# Altium PCB PCB.PcbDoc
Units mil, origin at the board's own origin, x right, y up, seen from the top; angles counter-clockwise.
Board outline 3543.66 x 3064.08 mil, 2 copper layers (Top Layer, Bottom Layer), stack 12.8 mil thick; 54 components, 65 nets, 265 pads, 11 vias.
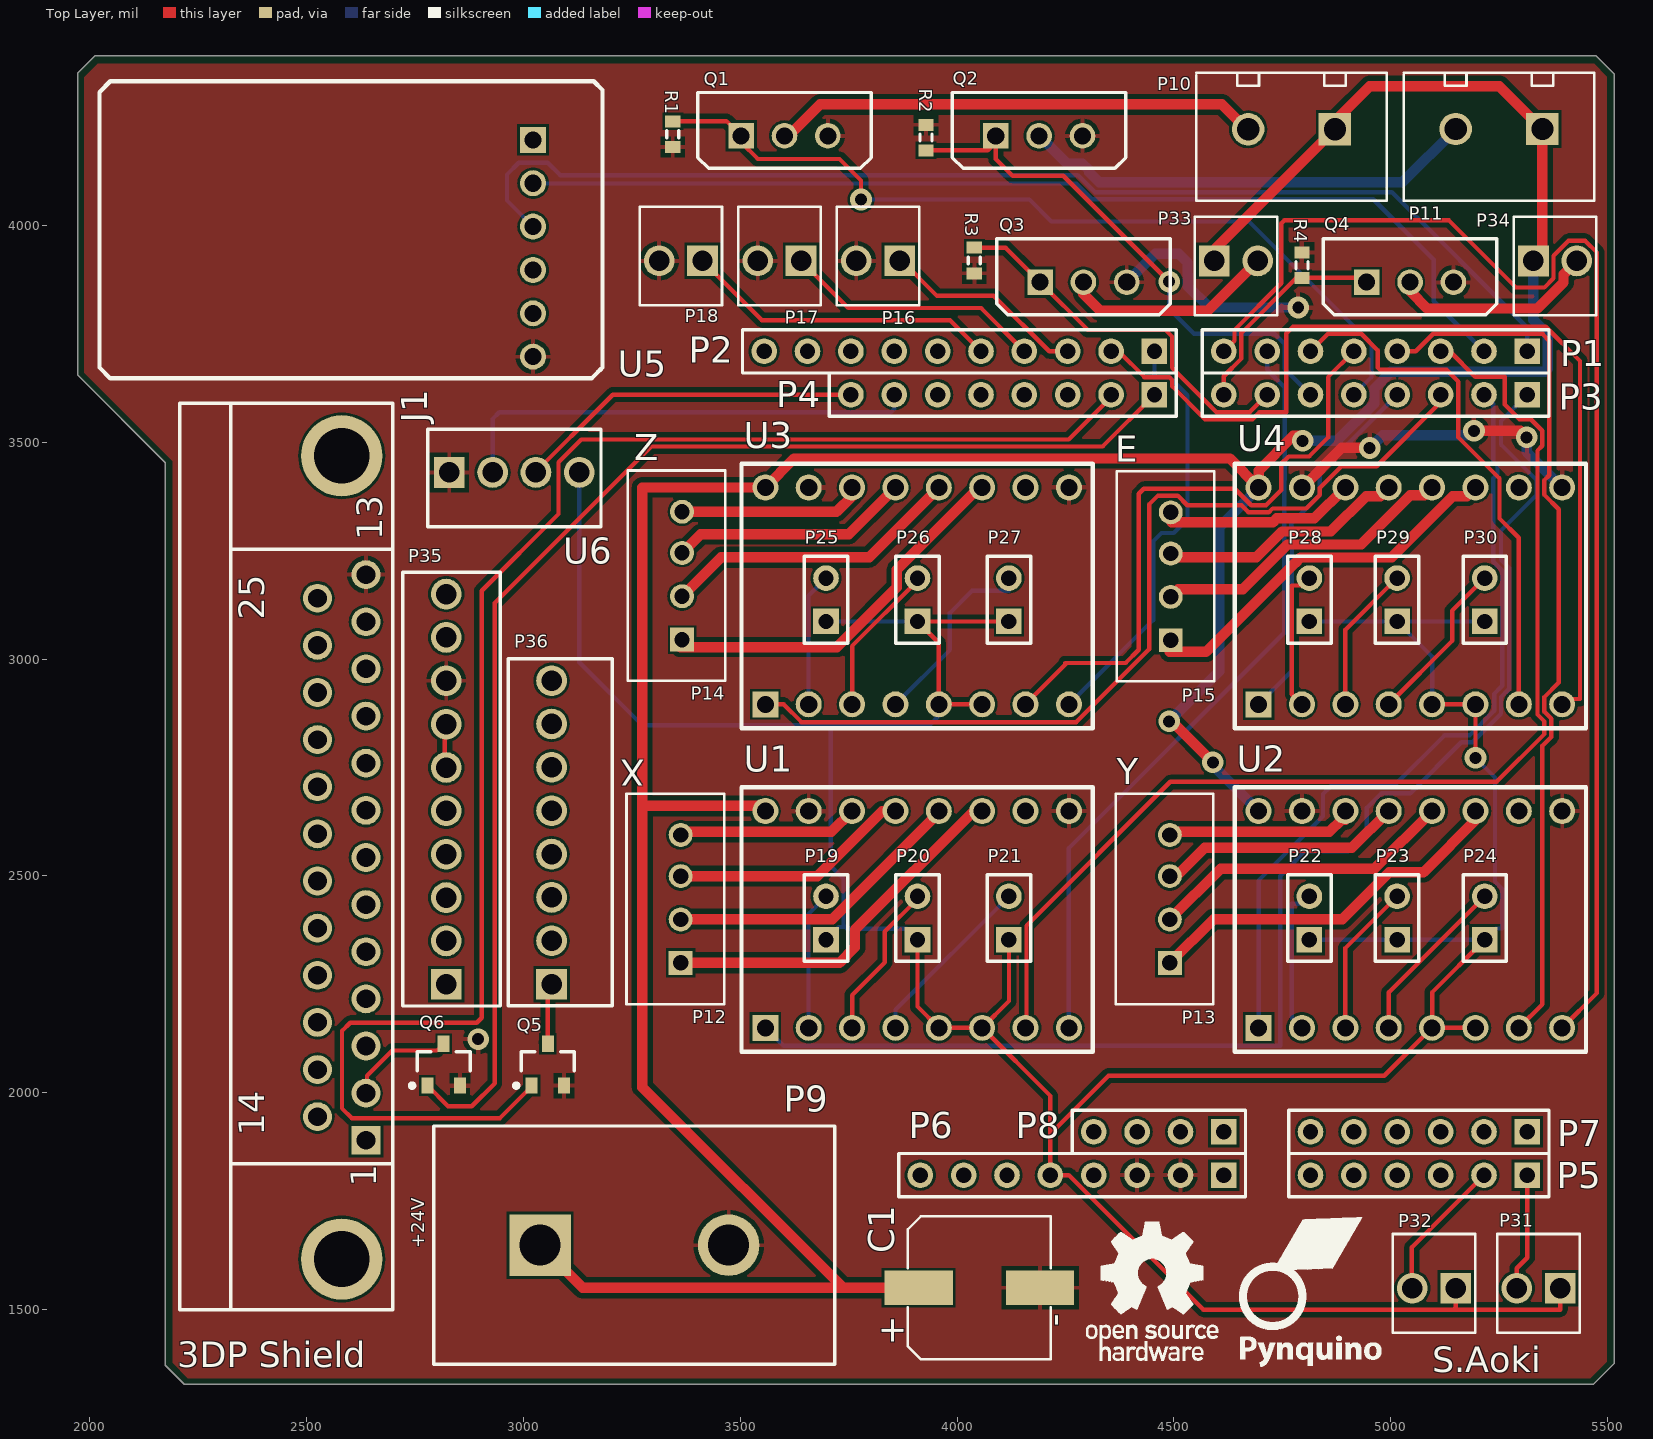
[diagram p0: Top Layer view]
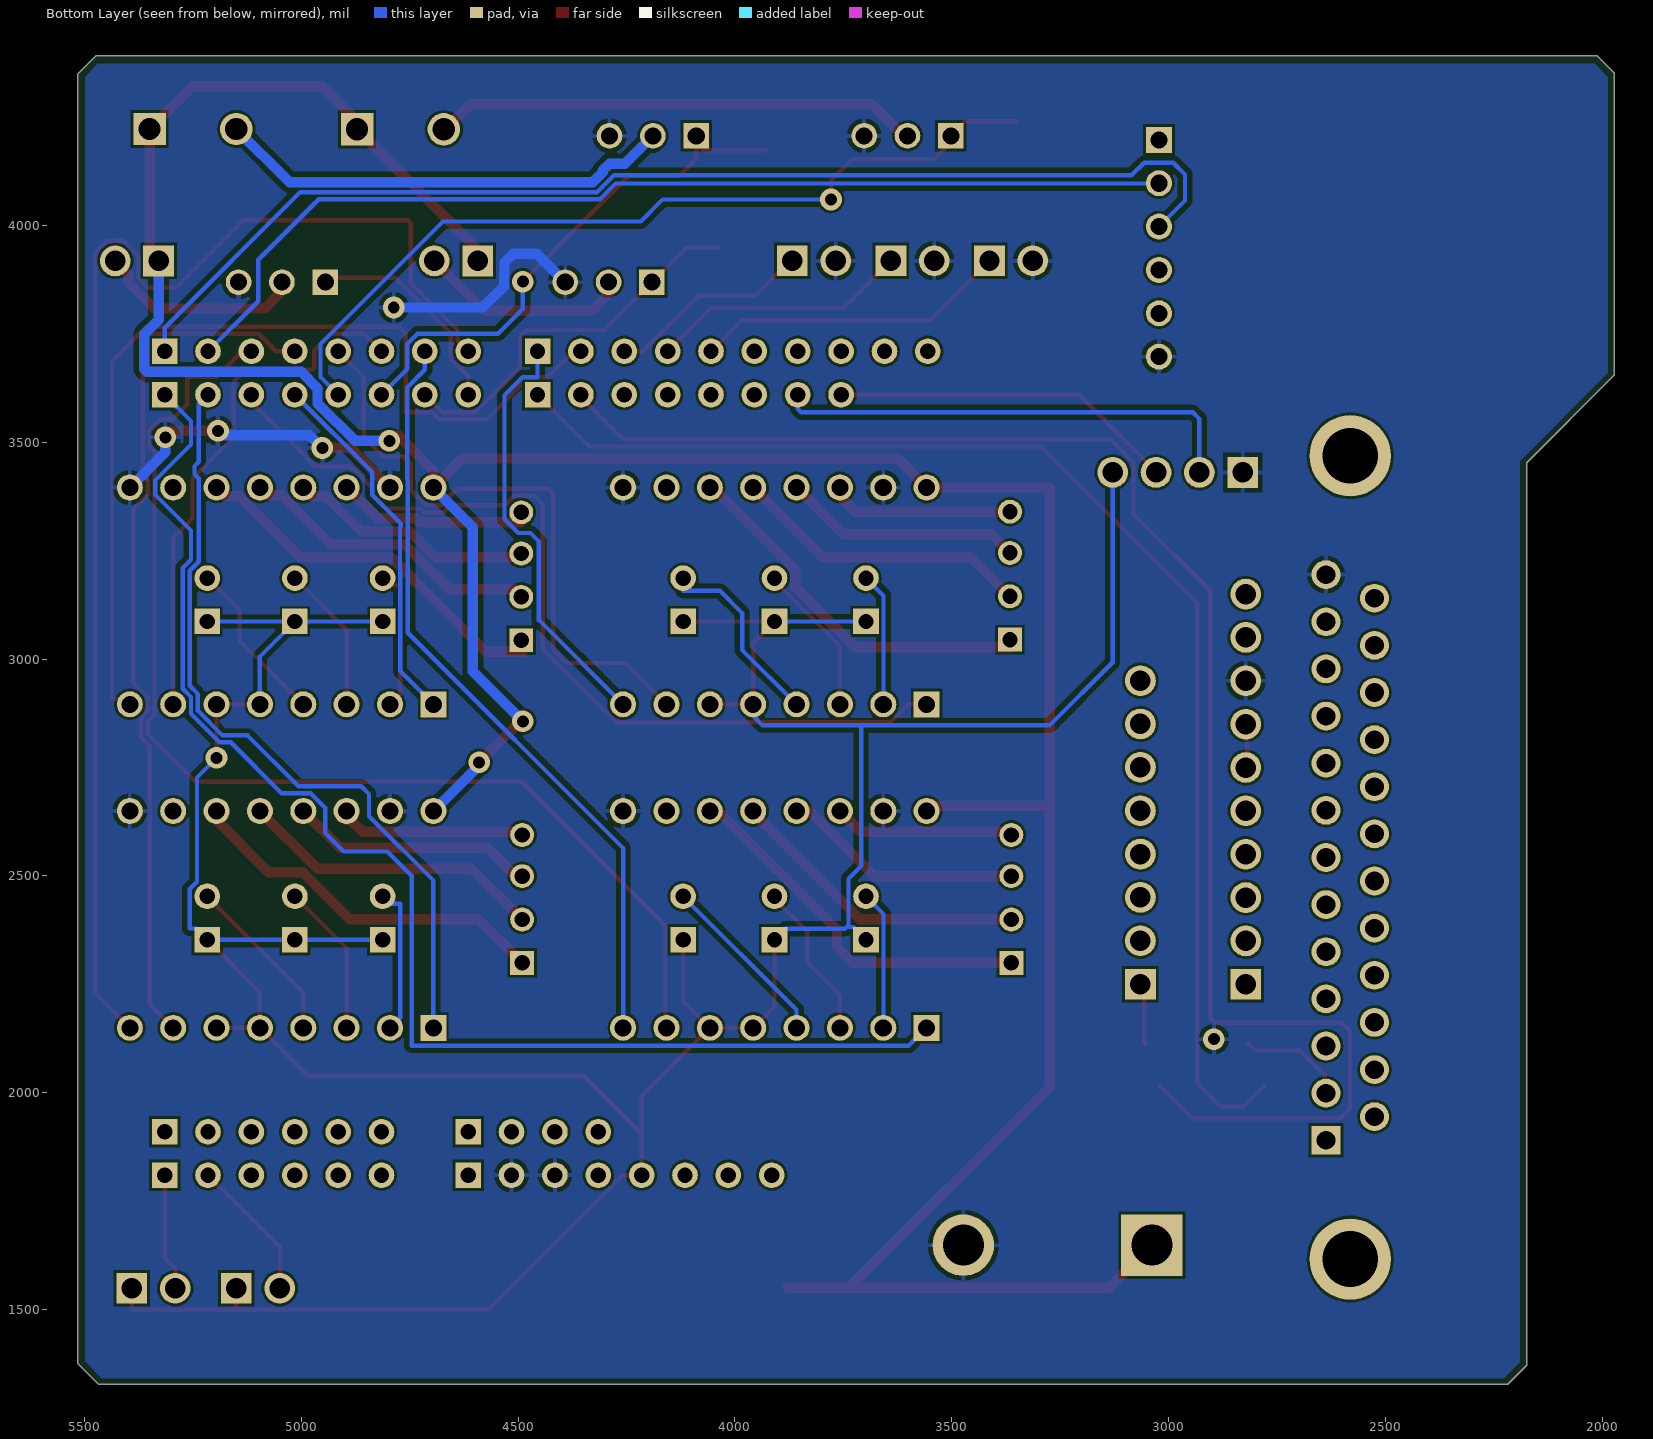
[diagram p1: Bottom Layer view, seen from below]

## Layer stack, top to bottom
Top Solder: solder mask 0.4, Solder Resist, Dk 3.5
Top Layer: signal copper 1.4
Dielectric 1: core 10, FR-4, Dk 4.2
Bottom Layer: signal copper 1.4
Bottom Solder: solder mask 0.4, Solder Resist, Dk 3.5

## Board outline
2173.73,1371.47 2173.73,1633.22 2173.73,3453.14 1971.85,3655.02 1971.85,4351.63 2011.89,4391.68 5473.34,4391.68 5515,4350.01 5515,1750 5515.51,1750.76 5515.51,1375.75 5467.35,1327.59 2217.61,1327.59

## Design rules (kind name [scope] priority, off if disabled: settings)
Clearance Clearance_M1 [OnLayer('Mechanical 1')] p1: gap=11.81 ignorepadtopadclearanceinfootprint=FALSE
Clearance [All] p2: gap=6 ignorepadtopadclearanceinfootprint=FALSE except(11.81: Track-Poly)
ComponentClearance [All] p1: gap=0 collisioncheckmode=3 verticalgap=0 showdistances=FALSE
HoleSize [All] p1: absolutevalues=TRUE maxlimit=130 minlimit=1 maxpercent=80.000 minpercent=20.000
MinimumSolderMaskSliver [All] p1: minsoldermaskwidth=0
PlaneConnect [All] p1: pad.planeconnectstyle=Relief pad.reliefexpansion=20 pad.reliefentries=4 pad.reliefconductorwidth=10 pad.reliefairgap=10 via.planeconnectstyle=Direct via.reliefexpansion=20 via.reliefentries=4 via.reliefconductorwidth=10 via.reliefairgap=10
PolygonConnect [All] p1: connectstyle=Relief reliefconductorwidth=10 reliefentries=4 polygonreliefangle="90 Angle" airgapwidth=10
RoutingVias [All] p1: holewidth=28 width=50 viastyle="Through Hole" minholewidth=28 minwidth=50 maxholewidth=28 maxwidth=50
SilkToSilkClearance [All] p1: silktosilkclearance=0
SilkToSolderMaskClearance [IsPad] p1: minsilkscreentomaskgap=1 clearancetoexposedcopper=TRUE
SolderMaskExpansion [All] p1: expansion=4
Width Width_Stepper_NetClass [InNetClass('Stepper')] p1: maxlimit=24 minlimit=10 preferedwidth=24
Width Width_Power_NetClass [InNetClass('Power')] p2: maxlimit=24 minlimit=10 preferedwidth=24 minimp=50.000000 maximp=50.000000 favimp=50.000000
Width [All] p3: maxlimit=10 minlimit=10 preferedwidth=10
24 further rules are at their usual default settings.

## Classes and differential pairs
component class Misc: C1 J1 P1 P2 P3 P4 P5 P6 P7 P8 P9 P35 P36 Q5 Q6 U5 U6
net class Stepper: E8-1 E8-2 E8-3 E8-4 X8-1 X8-2 X8-3 X8-4 Y8-1 Y8-2 Y8-3 Y8-4 Z8-1 Z8-2 Z8-3 Z8-4
net class Power: +24V GND NetP10_2 NetP11_2 NetP33_2 NetP34_2
component class Connector: P10 P11 P12 P13 P14 P15 P16 P17 P18 P19 P20 P21 P22 P23 P24 P25 P26 P27 P28 P29 P30 P31 P32 P33 P34 Q1 Q2 Q3 Q4 R1 R2 R3 R4 R? U1 U2 U3 U4 X

## Components (designator, comment, footprint, x,y, rotation, side; value= is the part's Value field where it differs from the comment)
C1 "Cap_alumi_electrolytic" EEE-1HA101UP 4191.23,1550.27 r270 top
J1 "D Connector 25" DSUB1.385-2H25A 2206.71,2542.69 r90 top
P1 "" HDR1X8 5315,3710 r180 top
P2 "" HDR1X10 4455,3710 r180 top
P3 "" HDR1X8 5315,3610 r180 top
P4 "" HDR1X8 4455,3610 r180 top
P5 "" HDR1X6 5315,1810 r180 top
P6 "" HDR1X8 4615,1810 r180 top
P7 "" HDR1X6 5315,1910 r180 top
P8 "Header 4" HDR1X4 4615,1910 r180 top
P9 "BP101L-2PN10" BP101L-2PN10 3038.15,1648.44 r0 top
P10 "OSTTC02-0162" OSTTC02-0162 4871.18,4222.01 r180 top
P11 "OSTTC02-0162" OSTTC02-0162 5349.76,4222.63 r180 top
P12 "B4B-XH-A(LF)(SN)" B4B-XH-A 3362.45,2299.62 r90 top
P13 "B4B-XH-A(LF)(SN)" B4B-XH-A 4490.51,2299.62 r90 top
P14 "B4B-XH-A(LF)(SN)" B4B-XH-A 3365.61,3045.04 r90 top
P15 "B4B-XH-A(LF)(SN)" B4B-XH-A 4492.59,3043.65 r90 top locked
P16 "2204-1021" MOLEX_2204_1021 3867.41,3918.64 r180 top
P17 "2204-1021" MOLEX_2204_1021 3640.08,3918.64 r180 top
P18 "2204-1021" MOLEX_2204_1021 3412.74,3918.64 r180 top
P19 "Header 2" HDR1X2 3697.57,2352.97 r90 top
P20 "Header 2" HDR1X2 3908.49,2352.97 r90 top
P21 "Header 2" HDR1X2 4119.41,2352.97 r90 top
P22 "Header 2" HDR1X2 4812.41,2352.97 r90 top
P23 "Header 2" HDR1X2 5014.59,2352.97 r90 top
P24 "Header 2" HDR1X2 5216.77,2352.97 r90 top
P25 "Header 2" HDR1X2 3697.57,3086.99 r90 top
P26 "Header 2" HDR1X2 3908.49,3086.99 r90 top
P27 "Header 2" HDR1X2 4119.41,3086.99 r90 top
P28 "Header 2" HDR1X2 4812.41,3086.99 r90 top
P29 "Header 2" HDR1X2 5014.59,3086.99 r90 top
P30 "Header 2" HDR1X2 5216.77,3086.99 r90 top
P31 "2204-1021" MOLEX_2204_1021 5390.76,1549.25 r180 top
P32 "2204-1021" MOLEX_2204_1021 5149.76,1549.25 r180 top
P33 "2204-1021" MOLEX_2204_1021 4593.17,3918.45 r0 top
P34 "2204-1021" MOLEX_2204_1021 5329.03,3918.45 r0 top
P35 "22041101" PHOENIX_10PIN_MOLEX 2821.66,2250.13 r90 top
P36 "22041081" PHOENIX_8PIN_MOLEX 3064.63,2250.5 r90 top
Q1 "2SK2232" 2SK2232 3501.78,4206.87 r0 top
Q2 "2SK2232" 2SK2232 4089.01,4206.87 r0 top
Q3 "2SK2232" 2SK2232 4191.23,3869.43 r0 top
Q4 "2SK2232" 2SK2232 4944.53,3869.43 r0 top
Q5 "MMBF170" MMBF170-SOT95P240X130-3N 3056.03,2064.74 r90 top
Q6 "MMBF170" MMBF170-SOT95P240X130-3N 2815.69,2064.74 r90 top
R1 "" J1-0603 3344.31,4210.69 r270 top value=10K
R2 "" J1-0603 3928.16,4202.81 r90 top value=10K
R3 "" J1-0603 4039.69,3919.37 r270 top value=10K
R4 "" J1-0603 4795.33,3908.64 r90 top value=10K
U1 "DRV8825" DRV8825 4257.72,2149.78 r90 top locked
U2 "DRV8825" DRV8825 5395.33,2149.78 r90 top locked
U3 "DRV8825" DRV8825 4257.72,2895.88 r90 top locked
U4 "DRV8825" DRV8825 5395.33,2895.88 r90 top locked
U5 "FTDI_USB_Serial" FTDI_USB_Serial 3021.95,4197.59 r0 top
U6 "RS232C_TO_TTL_MOLEX" RS232C_TO_TTL_MOLEX 2828.67,3430.59 r0 top

## Footprints (in the part's own frame and the unit in brackets; to place one, negate y for a bottom-side part, rotate by r counter-clockwise, add the part's x,y. Pads: shape width x height; smd on the part's side, far side on the other; paste and mask are expansions set on the pad)
2SK2232 [mm]
  round 1.5 hole 1: D(2.54,0) S(5.08,0)
  rect 1.5x1.5 hole 1: G(0,0)
  silkscreen extent -2.54,-1.91 7.62,2.54
B4B-XH-A [mm]
  rect 1.4x1.4 hole 0.9: 1(0,0)
  round 1.4 hole 0.9: 2(2.54,0) 3(5.08,0) 4(7.493,0)
  silkscreen extent -2.41,-2.54 9.91,3.18
BP101L-2PN10 [mm]
  rect 3.6x3.6 hole 2.4: 1(0,0)
  round 3.6 hole 2.4: 2(11.049,0)
  silkscreen extent -6.22,-6.98 17.27,6.98
DRV8825 [mil]
  round 60 hole 39.37: A1(500,300) A2(500,200) B1(500,400) B2(500,500) DIR(0,0) FAULT(500,100) GND(500,600) GND(500,0) M0(0,600) M1(0,500) M2(0,400) RESET(0,300) SLEEP(0,200) STEP(0,100) VMOT(500,700)
  rect 60x60 hole 39.37: ENABLE(0,700)
  silkscreen extent -55,-55 555,755
DSUB1.385-2H25A [mm] "Connector; D Subminiature; 25 Position; Right Angle; Pitch 1.385 mm"
  rect 1.69x1.69 hole 1.09: 1(-16.566,-10.92)
  round 1.69 hole 1.09: 2(-13.805,-10.92) 3(-11.044,-10.92) 4(-8.283,-10.92) 5(-5.522,-10.92) 6(-2.761,-10.92) 7(0,-10.92) 8(2.761,-10.92) 9(5.522,-10.92) 10(8.283,-10.92) 11(11.044,-10.92) 12(13.805,-10.92) 13(16.566,-10.92) 14(-15.185,-8.08) 15(-12.424,-8.08) 16(-9.663,-8.08) 17(-6.902,-8.08) 18(-4.141,-8.08) 19(-1.38,-8.08) 20(1.381,-8.08) 21(4.142,-8.08) 22(6.903,-8.08) 23(9.664,-8.08) 24(12.425,-8.08) 25(15.186,-8.08)
  round 4.76 hole 3.26: 26(-23.526,-9.5) 27(23.526,-9.5)
  silkscreen extent -26.5,-12.5 26.6,0
EEE-1HA101UP [mm]
  rect 2x4 smd: 1(0,0) 2(0,-7.112)
  silkscreen extent -4.19,-7.75 4.19,0.64
FTDI_USB_Serial [mil]
  rect 60x60 hole 39.37: 1(0,0)
  round 60 hole 39.37: 2(0,-100) 3(0,-200) 4(0,-300) 5(0,-400) 6(0,-500)
  silkscreen extent -1000,-550 160,135
HDR1X2 [mm] "Connector; Header; 2 Position"
  rect 1.5x1.5 hole 0.9: 1(0,0)
  round 1.5 hole 0.9: 2(2.54,0)
  silkscreen extent -1.27,-1.27 3.81,1.27
HDR1X4 [mm] "Connector; Header; 4 Position"
  rect 1.5x1.5 hole 0.9: 1(0,0)
  round 1.5 hole 0.9: 2(2.54,0) 3(5.08,0) 4(7.62,0)
  silkscreen extent -1.27,-1.27 8.89,1.27
HDR1X6 [mm] "Connector; Header; 6 Position"
  rect 1.5x1.5 hole 0.9: 1(0,0)
  round 1.5 hole 0.9: 2(2.54,0) 3(5.08,0) 4(7.62,0) 5(10.16,0) 6(12.7,0)
  silkscreen extent -1.27,-1.27 13.97,1.27
HDR1X8 [mm] "Connector; Header; 8 Position"
  rect 1.5x1.5 hole 0.9: 1(0,0)
  round 1.5 hole 0.9: 2(2.54,0) 3(5.08,0) 4(7.62,0) 5(10.16,0) 6(12.7,0) 7(15.24,0) 8(17.78,0)
  silkscreen extent -1.27,-1.27 19.05,1.27
HDR1X10 [mm] "Connector; Header; 10 Position"
  rect 1.5x1.5 hole 0.9: 1(0,0)
  round 1.5 hole 0.9: 2(2.54,0) 3(5.08,0) 4(7.62,0) 5(10.16,0) 6(12.7,0) 7(15.24,0) 8(17.78,0) 9(20.32,0) 10(22.86,0)
  silkscreen extent -1.27,-1.27 24.13,1.27
J1-0603 [mm] "Chip Resistor, Body 1.6x0.8mm, IPC High Density"
  rect 0.7x0.9 smd: 1(-0.75,0) 2(0.75,0)
  silkscreen extent -0.2,-0.35 0.2,0.35, body extent -0.85,-0.48 0.85,0.48, height 0.9
MMBF170-SOT95P240X130-3N [mm] "SOT23, 3-Leads, Body 2.92x2.40mm, Pitch 0.95mm, IPC Medium Density"
  rect 0.95x0.7 smd: 1(-1.225,0.95) 2(-1.225,-0.95) 3(1.225,0)
  silkscreen extent -1.35,-1.55 0.75,1.97, body extent -0.75,-1.56 0.75,1.56, height 1.3
MOLEX_2204_1021 [mm]
  rect 1.8x1.8 hole 1.2: 1(0,0)
  round 1.8 hole 1.2: 2(2.54,0)
  silkscreen extent -1.14,-3.17 3.68,2.6
OSTTC02-0162 [mm]
  rect 1.9x1.9 hole 1.3: 1(0,0)
  round 1.9 hole 1.3: 2(5.08,0)
  silkscreen extent -3.05,-3.3 8.13,4.19
PHOENIX_8PIN_MOLEX [mm]
  rect 1.8x1.8 hole 1.2: 1(0,0)
  round 1.8 hole 1.2: 2(2.54,0) 3(5.08,0) 4(7.62,0) 5(10.16,0) 6(12.7,0) 7(15.24,0) 8(17.78,0)
  silkscreen extent -1.27,-3.56 19.05,2.54
PHOENIX_10PIN_MOLEX [mm]
  rect 1.8x1.8 hole 1.2: 1(0,0)
  round 1.8 hole 1.2: 2(2.54,0) 3(5.08,0) 4(7.62,0) 5(10.16,0) 6(12.7,0) 7(15.24,0) 8(17.78,0) 9(20.32,0) 10(22.86,0)
  silkscreen extent -1.27,-3.17 24.13,2.54
RS232C_TO_TTL_MOLEX [mm]
  rect 1.8x1.8 hole 1.2: GND(0,0)
  round 1.8 hole 1.2: RX(5.08,0) TX(2.54,0) VCC(7.62,0)
  silkscreen extent -1.27,-3.17 8.89,2.54

## Part data
J1: "Receptacle Assembly, 25 Position, Right Angle", PackageDocument=U, DatasheetDocument=19-Mar-1999, Gender=Receptacle, LatestRevisionDate=17-Jul-2002, LatestRevisionNote="Re-released for DXP Platform.", Orientation="Right Angle", PackageReference=787202, Positions=25, Published=15-Jun-2001, Publisher="Altium Limited"
P1 P3 P4 P6: library part "Header 8", "Header, 8-Pin", LatestRevisionDate=17-Jul-2002, LatestRevisionNote="Re-released for DXP Platform.", Publisher="Altium Limited"
P2: library part "Header 10", "Header, 10-Pin", LatestRevisionDate=17-Jul-2002, LatestRevisionNote="Re-released for DXP Platform.", Publisher="Altium Limited"
P5 P7: library part "Header 6", "Header, 6-Pin", LatestRevisionDate=17-Jul-2002, LatestRevisionNote="Re-released for DXP Platform.", Publisher="Altium Limited"
P8: "Header, 4-Pin", LatestRevisionDate=17-Jul-2002, LatestRevisionNote="Re-released for DXP Platform.", Publisher="Altium Limited"
P10 P11: library part TERMINAL_BLOCK_1X2
P12 P13 P14 P15: library part XH_CONNECTOR_1X4
P16 P17 P18 P31 P32 P33 P34: library part MOLEX_1X2_HEADER
P19 P20 P21 P22 P23 P24 P25 P26 P27 P28 P29 P30: "Header, 2-Pin", LatestRevisionDate=17-Jul-2002, LatestRevisionNote="Re-released for DXP Platform.", Publisher="Altium Limited"
P35: library part Phoenix_10pin_MOLEX
P36: library part Phoenix_8pin_MOLEX
R1 R2 R3 R4: library part Res3, "Resistor", LatestRevisionDate=29-May-2009, LatestRevisionNote="IPC-7351 Footprint Added.", PackageDescription="Chip Resistor", PackageReference=J1-0603, Published=8-Jun-2000, Publisher="Altium Limited"
C1: =100uF

## Via types
v1: diameter 50, hole 27.56, Top Layer to Bottom Layer, tented both sides, 11 vias

## Nets (pads, with @x,y where several pads share a name; then routed paths per layer and width w, separated by ;. In a path a pad name is that pad's centre, name@x,y a point inside that pad or via, vN(x,y) a via of type N, cw(c..) or ccw(c..) an arc to the next point about the centre after c; other vN are vias at no path point)
+3V3: P6.5 P19.1 P20.1 P21.1 P22.1 P23.1 P24.1 P25.1 P26.1 P27.1 P28.1 P29.1 P30.1 P31.1 P32.1 U1.RESET U1.SLEEP U2.RESET U2.SLEEP U3.RESET U3.SLEEP U4.RESET U4.SLEEP U6.VCC | length 8232.4
  Top Layer w10: P20.1 3908.49,2199.01 U1.RESET U1.SLEEP ; U3.SLEEP U3.RESET 3957.72,3037.76 P26.1 P27.1 ; P21.1 4119.41,2211.47 U1.SLEEP ; U4.RESET U4.SLEEP v1(5195.33,2772.28) ; P32.1@5149.76,1550.27 P32.1 5149.76,1504 5145.52,1499.76 ; U2.SLEEP U2.RESET ; P24.1 5095.33,2231.53 U2.RESET ; P31.1@5390.76,1538.51 5390.76,1499.76 5145.52,1499.76 ; U1.SLEEP 4215,1992.5 4215,1905.53 ; 4215,1905.53 4348.96,2039.48 4985.03,2039.48 U2.RESET ; 4215,1905.53 P6.5 4257.69,1810 4567.93,1499.76 5145.52,1499.76
  Bottom Layer w10: U6.VCC@3128.67,3437.83 U6.VCC 3128.67,2992.98 3274.35,2847.3 3708.7,2847.3 ; P19.1 3727.05,2382.45 3742.31,2382.45 ; P25.1 P26.1 ; P20.1 3883.22,2378.24 3746.52,2378.24 3742.31,2382.45 ; U3.RESET 3957.72,2868.67 3936.34,2847.3 3708.7,2847.3 ; P22.1 P23.1 P24.1 5242.7,2378.9 5257.29,2378.9 5257.29,2469.76 5240.34,2486.71 5240.34,2727.26 v1(5195.33,2772.28) ; P28.1 P29.1 ; U4.RESET 5095.33,3006.25 P29.1 ; P30.1 P29.1 ; 3708.7,2847.3 3708.7,2522.9 3738.1,2493.5 3738.1,2386.66 3742.31,2382.45
+24V: C1.2 P9.1 P10.1 P11.1 P33.1 P34.1 U1.VMOT U2.VMOT U3.VMOT U4.VMOT | length 8002.6
  Top Layer w24: P9.1 3136.32,1550.27 3736.93,1550.27 ; U1.VMOT 3545.75,2661.75 3274.01,2661.75 ; C1.2@3877.72,1550.27 3736.93,1550.27 ; v1(4489.08,2856.55) 4495.24,2856.55 v1(4589.66,2762.13) ; P33.1 4593.17,3944 P10.1 4871.18,4240.98 4951.89,4321.7 5250.69,4321.7 P11.1 5349.76,3939.17 P34.1 ; v1(4796.83,3503.5) 4785.55,3514.77 4775.48,3514.77 4695.33,3434.62 U4.VMOT 4628.34,3462.86 3624.7,3462.86 U3.VMOT 3274.01,3395.88 3274.01,2661.75 ; 3274.01,2661.75 3274.01,2013.18 3736.93,1550.27
  Bottom Layer w24: v1(4489.08,2856.55) 4604.15,2971.61 4604.15,3304.7 U4.VMOT ; v1(4589.66,2762.13) 4589.66,2755.45 U2.VMOT ; v1(4796.83,3503.5) 4875.71,3503.5 4962.53,3590.31 4962.53,3624.74 5000.26,3662.47 5355.23,3662.47 5362.53,3669.77 5362.53,3749.45 5329.03,3782.94 P34.1
DISP-ON: P4.1 Q6.1 | length 3025.1
  Top Layer w10: Q6.1 2825.77,1969.03 2880.8,1969.03 2933.4,2021.63 2933.4,3129.55 3294.34,3490.49 4335.49,3490.49 P4.1
E8-1: P15.1 U4.A2 | length 861.9
  Top Layer w24: P15.1@4490.51,3016.68 4573.93,3016.68 4778.93,3221.68 4779.89,3221.68 4792.72,3234.51 5001.85,3234.51 5143.33,3375.99 5175.44,3375.99 U4.A2
E8-2: P15.2 U4.A1 | length 710.2
  Top Layer w24: P15.2@4490.51,3141.57 P15.2 4510.34,3161.4 4658.85,3161.4 4761.96,3264.51 4931.85,3264.51 5045.21,3377.88 5077.33,3377.88 U4.A1
E8-3: P15.3 U4.B1 | length 578.1
  Top Layer w24: P15.3@4483.83,3235.13 4690.15,3235.13 4749.53,3294.51 4861.85,3294.51 4943.33,3375.99 4975.44,3375.99 U4.B1
E8-4: P15.4 U4.B2 | length 433.8
  Top Layer w24: P15.4@4494.7,3315.88 4728.46,3315.88 4737.1,3324.51 4823.97,3324.51 U4.B2
E-DIR: P2.2 U4.DIR | length 2207.6
  Top Layer w10: P2.2 4372.35,3710 4431.83,3650.53 4489.08,3650.53 4495.53,3644.08 4495.53,3629.73 4571.78,3553.47 4681.1,3553.47 4697.1,3569.47 4759.3,3569.47 4759.3,3751.26 4774.57,3766.53 5357.42,3766.53 5436.33,3687.62 5436.33,2908.15 5407.6,2908.15 U4.DIR
E-EN: P3.4 U4.ENABLE | length 848
  Bottom Layer w10: U4.ENABLE 4771.88,2972.43 4771.88,3203.77 4772.15,3204.04 4772.15,3305.97 4770.33,3307.79 4770.33,3312.89 4836.33,3378.89 4836.33,3431.33 P3.4
E-M0: P28.2 U4.M0 | length 331.3
  Top Layer w10: U4.M0 4771.88,2919.32 4771.88,3169.9 4795.33,3169.9 P28.2
E-M1: P29.2 U4.M1 | length 340.5
  Top Layer w10: U4.M1 4895.33,3067.73 P29.2
E-M2: P30.2 U4.M2 | length 382.8
  Top Layer w10: U4.M2 5141.53,3042.08 5141.53,3111.75 P30.2
E-STEP: P1.6 U4.STEP | length 1228.8
  Top Layer w10: P1.6 4855.53,3750.53 4931.79,3750.53 4969.65,3712.66 4969.65,3672.69 4975.02,3667.31 5128.7,3667.31 5156.04,3639.97 5156.04,3511.52 5250.69,3416.87 5250.69,3324.51 5295.33,3279.88 U4.STEP
FAN0: P3.7 Q3.G R3.1 | length 891.4
  Top Layer w10: R3.1 4111.76,3948.9 Q3.G 4301.52,3759.14 4480.47,3759.14 4495.53,3744.08 4495.53,3672.16 4598.21,3569.47 4674.47,3569.47 P3.7
FAN1: P3.8 Q4.G R4.1 | length 505.2
  Top Layer w10: P3.8 4615,3652.69 4655.53,3693.21 4655.53,3752.51 4782.62,3879.6 4934.36,3879.6 Q4.G
GND: C1.1 J1.13 P6.2 P6.3 P9.2 P16.2 P17.2 P18.2 P35.8 Q1.S Q2.S Q3.S Q4.S Q5.2 Q6.2 R1.2 R2.2 R3.2 R4.2 U1.GND U2.GND U3.GND U4.GND U5.6 U6.GND | length 1232.8
  Top Layer w24: U4.GND@4795.33,3395.88 4886.62,3487.17 v1(4951.34,3487.17) ; v1(5192.04,3526.43) 5298.7,3526.43 v1(5313.48,3511.65)
  Bottom Layer w24: Q3.S 4456.44,3934.64 4510.75,3934.64 4531.34,3914.05 4531.34,3889.06 4532.08,3888.31 4532.08,3860.28 4581.26,3811.1 v1(4786.71,3811.1) ; v1(4951.34,3487.17) 4981,3516.83 5182.45,3516.83 v1(5192.04,3526.43) ; v1(5313.48,3511.65) 5313.48,3477.72 U4.GND@5395.33,3395.88
  other v1: 2895.32,2123.51
HTR0: P3.5 Q1.G R1.1 | length 1986.4
  Top Layer w10: R1.1@3350,4240.85 3356.07,4240.85 3467.8,4240.85 Q1.G 3501.78,4192.33 3540.47,4153.64 3728.71,4153.64 3778.31,4104.05 v1(3778.31,4060)
  Bottom Layer w10: v1(3778.31,4060) 4166.68,4060 4217.22,4009.46 4672.86,4009.46 4955.53,3726.79 4955.53,3650.53 P3.5
HTR1: P3.6 Q2.G R2.1 | length 1243.2
  Top Layer w10: R2.1 4070.72,4173.29 Q2.G@4089.01,4191.57 ; Q2.G Q2.G@4089.01,4191.57 ; v1(4489.08,3870.5) 4244.79,4114.79 4127.86,4114.79 4089.01,4153.64 Q2.G@4089.01,4191.57
  Bottom Layer w10: v1(4489.08,3870.5) 4489.08,3807.65 4546.21,3750.53 4731.79,3750.53 4755.53,3726.79 4755.53,3669.47 P3.6
NetJ1_2: J1.2 Q6.3 | length 239.6
  Top Layer w10: J1.2@2638.95,2006.91 2638.95,2039.24 2697.16,2097.44 2800.17,2097.44 Q6.3
NetP10_2: P10.2 Q1.D | length 1123.2
  Top Layer w24: Q1.D 3611.75,4206.87 3684.24,4279.37 3713.91,4279.37 4610.68,4279.37 4668.04,4222.01 P10.2
NetP11_2: P11.2 Q2.D | length 1058.8
  Bottom Layer w24: Q2.D@4189.01,4191.57 Q2.D@4189.38,4191.19 ; Q2.D 4253.66,4142.22 4289.06,4142.22 4304.22,4127.06 4304.22,4123.01 4327.37,4099.86 5026.98,4099.86 P11.2
NetP33_2: P33.2 Q3.D | length 492.4
  Top Layer w24: Q3.D 4291.23,3842.83 4330.55,3803.51 4578.23,3803.51 P33.2
NetP34_2: P34.2 Q4.D | length 478.5
  Top Layer w24: Q4.D 5044.53,3848.49 5084.38,3808.64 5338.18,3808.64 5398.47,3868.93 5398.47,3887.88 P34.2
NetP35_6: P35.6 P35.7 | length 100
  Top Layer w10: P35.6@2818.4,2751.58 P35.7@2818.4,2851.58
NetP36_1: P36.1 Q5.3 | length 146.6
  Top Layer w10: Q5.3@3052.17,2116.83 Q5.3 3056.03,2241.9 P36.1
RX0: P1.1 U5.3 | length 2721.5
  Bottom Layer w10: U5.3 2961.8,4057.74 2961.8,4117.79 2988.79,4144.78 3056.01,4144.78 3084.44,4116.35 3099.59,4116.35 4278.35,4116.35 4317.84,4076.86 5002.59,4076.86 5315,3764.45 P1.1
RX1: P4.7 U6.TX | length 1084.9
  Bottom Layer w10: U6.TX@2928.67,3437.83 2928.67,3553.95 2944.19,3569.47 3847.25,3569.47 3855,3577.22 P4.7
TH0-AIN: P5.1 P31.2 | length 270.8
  Top Layer w10: P31.2 5290.76,1595.2 5315,1619.43 P5.1
TH1-AIN: P5.2 P32.2 | length 328.7
  Top Layer w10: P32.2@5048.43,1550.27 5048.43,1643.43 P5.2
TX0: P1.2 U5.2 | length 2414.4
  Bottom Layer w10: U5.2@3021.95,4084.83 3034.07,4096.95 4275.12,4096.95 4311.21,4060.86 4959.81,4060.86 5099.37,3921.3 5099.37,3825.63 P1.2
TX1: P4.8 U6.RX | length 824.3
  Top Layer w10: U6.RX@3011.22,3415.51 3205.72,3610 P4.8
UV-ON: P4.2 Q5.1 | length 3689
  Top Layer w10: Q5.1 3018.63,2014.44 2945.77,1941.58 2603.9,1941.58 2581.44,1964.04 2581.44,2142.67 2600.13,2161.36 2891.94,2161.36 2903.41,2172.83 2903.41,3157.77 3080.52,3334.88 3080.52,3454.04 3132.96,3506.49 4257.51,3506.49 4355,3603.98 P4.2
X8-1: P12.1 U1.A2 | length 864.2
  Top Layer w24: P12.1 3728.74,2299.62 3764.36,2335.24 3764.36,2376.05 4038.09,2649.78 U1.A2
X8-2: P12.2 U1.A1 | length 701.2
  Top Layer w24: P12.2 3363.33,2400.5 3712.31,2400.5 3957.72,2645.9 U1.A1
X8-3: P12.3 U1.B1 | length 557.5
  Top Layer w24: P12.3 3677.01,2499.62 3827.17,2649.78 U1.B1
X8-4: P12.4 U1.B2 | length 418.4
  Top Layer w24: P12.4 3370,2602.17 3537.45,2602.17 3537.84,2601.78 3709.72,2601.78 U1.B2
X-DIR: P1.7 U1.DIR | length 1783.2
  Bottom Layer w10: U1.DIR 4257.72,2564.29 4754.33,3060.9 4754.33,3412.86 4755.53,3414.06 4755.53,3626.79 4715,3667.31 P1.7
X-EN: P3.1 U1.ENABLE | length 3138.3
  Bottom Layer w10: U1.ENABLE 3598.72,2108.78 4745.25,2108.78 4745.25,2500.02 4801.72,2556.49 4902.04,2556.49 4944.53,2598.99 4944.53,2656.97 4978.34,2690.78 5045.28,2690.78 5162.77,2808.28 5188.34,2808.28 5254.33,2874.27 5254.33,2912.86 5273.29,2931.82 5273.29,3210.4 5254.33,3229.37 5254.33,3296.89 5336.33,3378.89 5336.33,3412.86 5254.33,3494.86 5254.33,3549.33 P3.1
X-M0: P19.2 U1.M0 | length 320.3
  Bottom Layer w10: U1.M0 3657.05,2150.45 3657.05,2412.44 P19.2
X-M1: P20.2 U1.M1 | length 365.6
  Top Layer w10: U1.M1 3757.72,2225.14 3833.29,2300.7 3833.29,2371.65 3908.49,2446.85 P20.2
X-M2: P21.2 U1.M2 | length 411.6
  Bottom Layer w10: U1.M2 3857.72,2191.28 P21.2
X-MAX: P2.3 P16.1 | length 474
  Top Layer w10: P16.1 3872.7,3918.64 3953.47,3837.87 4084.45,3837.87 4212.31,3710 P2.3
X-STEP: P1.3 U1.STEP | length 2673.7
  Top Layer w10: U1.STEP 4159.94,2149.78 4159.94,2385.34 4491.66,2717.07 5244.1,2717.07 5354.33,2827.29 5354.33,2856.27 5338.33,2872.27 5338.33,3480.92 5349.48,3492.07 5349.48,3526.56 5322.76,3553.28 5297.11,3553.28 5263,3587.39 5263,3651.47 5194.51,3651.47 5135.97,3710 P1.3
Y8-1: P13.1 U2.A2 | length 867
  Top Layer w24: P13.1 4591.38,2400.5 4888.47,2400.5 4997,2509.03 5075.6,2509.03 5201.18,2634.62 5201.18,2643.92 U2.A2
Y8-2: P13.2 U2.A1 | length 708.4
  Top Layer w24: P13.2 4607.46,2516.58 4962.12,2516.58 U2.A1
Y8-3: P13.3 U2.B1 | length 567
  Top Layer w24: P13.3 4505.56,2499.62 4570.56,2564.62 4910.17,2564.62 U2.B1
Y8-4: P13.4 U2.B2 | length 439.3
  Top Layer w24: P13.4 4497.66,2601.78 4858.62,2601.78 4886.74,2629.9 4895.33,2629.9 U2.B2
Y-DIR: P1.8 U2.DIR | length 3052.3
  Top Layer w10: P1.8 4639.53,3734.53 4639.53,3759.14 4747.3,3866.91 4747.3,4005.04 4754.17,4011.91 5134.41,4011.91 5289.03,3857.29 5354.3,3857.29 5375.47,3878.46 5375.47,3930.54 5409.8,3964.88 5448.27,3964.88 5475.47,3937.68 5475.47,2229.92 U2.DIR
Y-EN: P3.2 U2.ENABLE | length 1837.3
  Bottom Layer w10: U2.ENABLE 4695.33,2489.26 4843.57,2637.51 4843.57,2688.97 4861.39,2706.78 5006.15,2706.78 5123.65,2824.28 5181.71,2824.28 5238.33,2880.89 5238.33,2919.49 5257.29,2938.45 5257.29,3203.77 5236.33,3224.74 5236.33,3416.86 5246.01,3426.55 5246.01,3445.6 5236.33,3455.29 5236.33,3588.67 P3.2
Y-M0: P22.2 U2.M0 | length 343.4
  Bottom Layer w10: U2.M0 4771.88,2173.23 4771.88,2435.89 4795.33,2435.89 P22.2
Y-M1: P23.2 U2.M1 | length 352.6
  Top Layer w10: U2.M1 4895.33,2333.71 P23.2
Y-M2: P24.2 U2.M2 | length 394.9
  Top Layer w10: U2.M2 4995.33,2231.53 P24.2
Y-MAX: P2.4 P17.1 | length 601.3
  Top Layer w10: P17.1 3748.95,3809.76 4055.24,3809.76 P2.4
Y-STEP: P1.4 U2.STEP | length 2029.2
  Top Layer w10: P1.4 5057.69,3710 5098.21,3750.53 5350.79,3750.53 5350.79,3748.82 5365.48,3734.13 5365.48,3424.01 5354.33,3412.86 5354.33,3378.89 5387.47,3345.75 5387.47,2946 5354.33,2912.86 5354.33,2878.89 5370.33,2862.89 5370.33,2820.66 5349.76,2800.1 5349.76,2204.21 U2.STEP
Z8-1: P14.1 U3.A2 | length 871.6
  Top Layer w24: P14.1@3362.45,3027.76 3722.86,3027.76 3860.96,3165.87 3860.96,3206.67 4050.17,3395.88 U3.A2
Z8-2: P14.2 U3.A1 | length 696
  Top Layer w24: P14.2 3455.69,3235.13 3796.97,3235.13 U3.A1
Z8-3: P14.3 U3.B1 | length 554.6
  Top Layer w24: P14.3 3408.84,3288.28 3750.12,3288.28 U3.B1
Z8-4: P14.4 U3.B2 | length 426.9
  Top Layer w24: P14.4 3721.77,3340.04 3757.72,3375.99 U3.B2
Z-DIR: P2.1 U3.DIR | length 995.4
  Bottom Layer w10: U3.DIR 4451.95,3090.1 4451.95,3271.69 4471.4,3291.13 4499.6,3291.13 4531.15,3322.68 4531.15,3608.46 4489.08,3650.53 4455,3650.53 P2.1
Z-EN: P3.3 U3.ENABLE | length 2134.2
  Top Layer w10: U3.ENABLE 3599.74,2895.88 3640.74,2854.88 4274.7,2854.88 4442.76,3022.93 4442.76,3356.91 4463.06,3377.21 4508.56,3377.21 4530.9,3354.88 4655.72,3354.88 4671.72,3338.88 4718.94,3338.88 4727.58,3347.51 4759.58,3347.51 4785.71,3347.51 4804.95,3347.51 4836.33,3378.89 4836.33,3394.86 4886.49,3445.02 4967.74,3445.02 5115,3592.29 P3.3
Z-M0: P25.2 U3.M0 | length 308.2
  Bottom Layer w10: U3.M0 3657.05,2896.55 3657.05,3146.46 P25.2
Z-M1: P26.2 U3.M1 | length 353.6
  Top Layer w10: U3.M1 3757.72,3030.09 3908.49,3180.87 P26.2
Z-M2: P27.2 U3.M2 | length 449.4
  Bottom Layer w10: U3.M2 3983.24,3021.4 3983.24,3106.59 4034.22,3157.57 4119.41,3157.57 P27.2
Z-MAX: P2.5 P18.1 | length 728.7
  Top Layer w10: P18.1 3549.72,3781.66 3983.34,3781.66 P2.5
Z-STEP: P1.5 U3.STEP | length 1456.2
  Top Layer w10: U3.STEP 4249.42,2987.58 4249.42,2991.3 4388.5,2991.3 4418.81,3021.61 4418.81,3381.46 4430.56,3393.21 4640.01,3393.21 4678.34,3354.88 4712.31,3354.88 4747.58,3390.15 4747.58,3450.52 4764.56,3467.5 4811.74,3467.5 4855.53,3511.28 4855.53,3650.53 P1.5
pads on no net: J1.1 J1.3 J1.4 J1.5 J1.6 J1.7 J1.8 J1.9 J1.10 J1.11 J1.12 J1.14 J1.15 J1.16 J1.17 J1.18 J1.19 J1.20 J1.21 J1.22 J1.23 J1.24 J1.25 J1.26 J1.27 P2.6 P2.7 P2.8 P2.9 P2.10 P4.3 P4.4 P4.5 P4.6 P5.3 P5.4 P5.5 P5.6 P6.1 P6.4 P6.6 P6.7 P6.8 P7.1 P7.2 P7.3 P7.4 P7.5 P7.6 P8.1 P8.2 P8.3 P8.4 P35.1 P35.2 P35.3 P35.4 P35.5 P35.9 P35.10 P36.2 P36.3 P36.4 P36.5 P36.6 P36.7 P36.8 U1.FAULT U2.FAULT U3.FAULT U4.FAULT U5.1 U5.4 U5.5

## Polygon pours and split planes (outlines as drawn)
GND on Top Layer "GND_L01_P006" (solid, remove dead copper, pour order 6): 2226.18,1341.68 5460.18,1341.68 5498.65,1380.15 5498.65,4343.66 5469.35,4372.96 2017.67,4372.96 1986.8,4342.09 1987.05,3660.55 2190.84,3456.76 2190.84,1377.02
GND on Bottom Layer "GND_L02_P008" (solid, remove dead copper, pour order 8): 2226.34,1341.71 2226.66,1341.39 5459.98,1341.39 5459.98,1342.11 5498.59,1380.72 5498.59,4343.43 5469.27,4372.76 2017.41,4372.76 1986.52,4341.86 1986.52,3660.17 2190.34,3456.35 2190.27,3456.28 2190.27,1376.85 2191.24,1376.85 2226.44,1341.64

## Silkscreen, mask and mechanical layers (free items; w line width, h text height)
Top Overlay:
  drawing of 28 lines, arcs and shapes, not listed
  text "Z" at 3254.99,3458.56 h60
  text "E" at 4365.12,3455.57 h60
  text "X" at 3279.6,2768.31 h60 r180
  text "Y" at 4368.4,2711.58 h60
  text "+24V" at 2771.13,1640.86 h30 r90
  text "3DP Shield" at 2200.92,1367.45 h59.06
  text "S.Aoki" at 5095.44,1355.39 h59.06
Mechanical 1:
  lines w7.87: 5515,1750 5515,1910.25 5515,4350.01 5473.34,4391.68 2011.89,4391.68 1971.85,4351.63 1971.85,3655.02 2173.73,3453.14 2173.73,1633.22 2173.73,1371.47 2217.61,1327.59 5467.35,1327.59 5515.51,1375.75 5515.51,1750.76
Mechanical 13:
  circle w0.5: c5315.25,1810.25 r10
  circle w0.5: c5215.25,1810.25 r10
  circle w0.5: c5115.25,1810.25 r10
  circle w0.5: c5015.25,1810.25 r10
  circle w0.5: c4915.25,1810.25 r10
  circle w0.5: c4815.25,1810.25 r10
  circle w0.5: c4615.25,1810.25 r10
  circle w0.5: c4515.25,1810.25 r10
  circle w0.5: c4415.25,1810.25 r10
  circle w0.5: c4315.25,1810.25 r10
  circle w0.5: c4215.25,1810.25 r10
  circle w0.5: c4115.25,1810.25 r10
  circle w0.5: c4015.25,1810.25 r10
  circle w0.5: c3915.25,1810.25 r10
  circle w0.5: c5315.25,3710.25 r10
  circle w0.5: c5215.25,3710.25 r10
  circle w0.5: c5115.25,3710.25 r10
  circle w0.5: c5015.25,3710.25 r10
  circle w0.5: c4915.25,3710.25 r10
  circle w0.5: c4815.25,3710.25 r10
  circle w0.5: c4715.25,3710.25 r10
  circle w0.5: c4615.25,3710.25 r10
  circle w0.5: c4456.43,3710.25 r10
  circle w0.5: c4356.43,3710.25 r10
  circle w0.5: c4256.43,3710.25 r10
  circle w0.5: c4156.43,3710.25 r10
  circle w0.5: c4056.43,3710.25 r10
  circle w0.5: c3956.43,3710.25 r10
  circle w0.5: c3856.43,3710.25 r10
  circle w0.5: c3756.43,3710.25 r10
  circle w0.5: c3656.43,3710.25 r10
  circle w0.5: c3556.43,3710.25 r10

## Dimensions
2011.89,4391.68 to 2217.61,1327.59 on Mechanical 13
2173.73,1371.47 to 5515.51,1375.75 on Mechanical 13

## Text inside footprints (layer, text, board x,y; h text height)
C1: Top Overlay "-" at 4206.23,1490.27 h60 r270; Top Overlay "+" at 3826.23,1485.27 h60 r270
J1: Top Overlay "1" at 2660.04,1783.61 h59.06 r90; Top Overlay "13" at 2674.24,3274.04 h59.06 r90; Top Overlay "14" at 2402.58,1900.54 h59.06 r90; Top Overlay "25" at 2402.58,3091.33 h59.06 r90